# Altium PCB RaumluftsensorC3.PcbDoc
Units mm, origin at the board's own origin, x right, y up, seen from the top; angles counter-clockwise.
Board outline 38.1 x 38.1 mm, 2 copper layers (Top Layer, Bottom Layer); 6 components, 5 nets, 35 pads, 0 vias.
Unrouted connection lines stored in the file: 1.
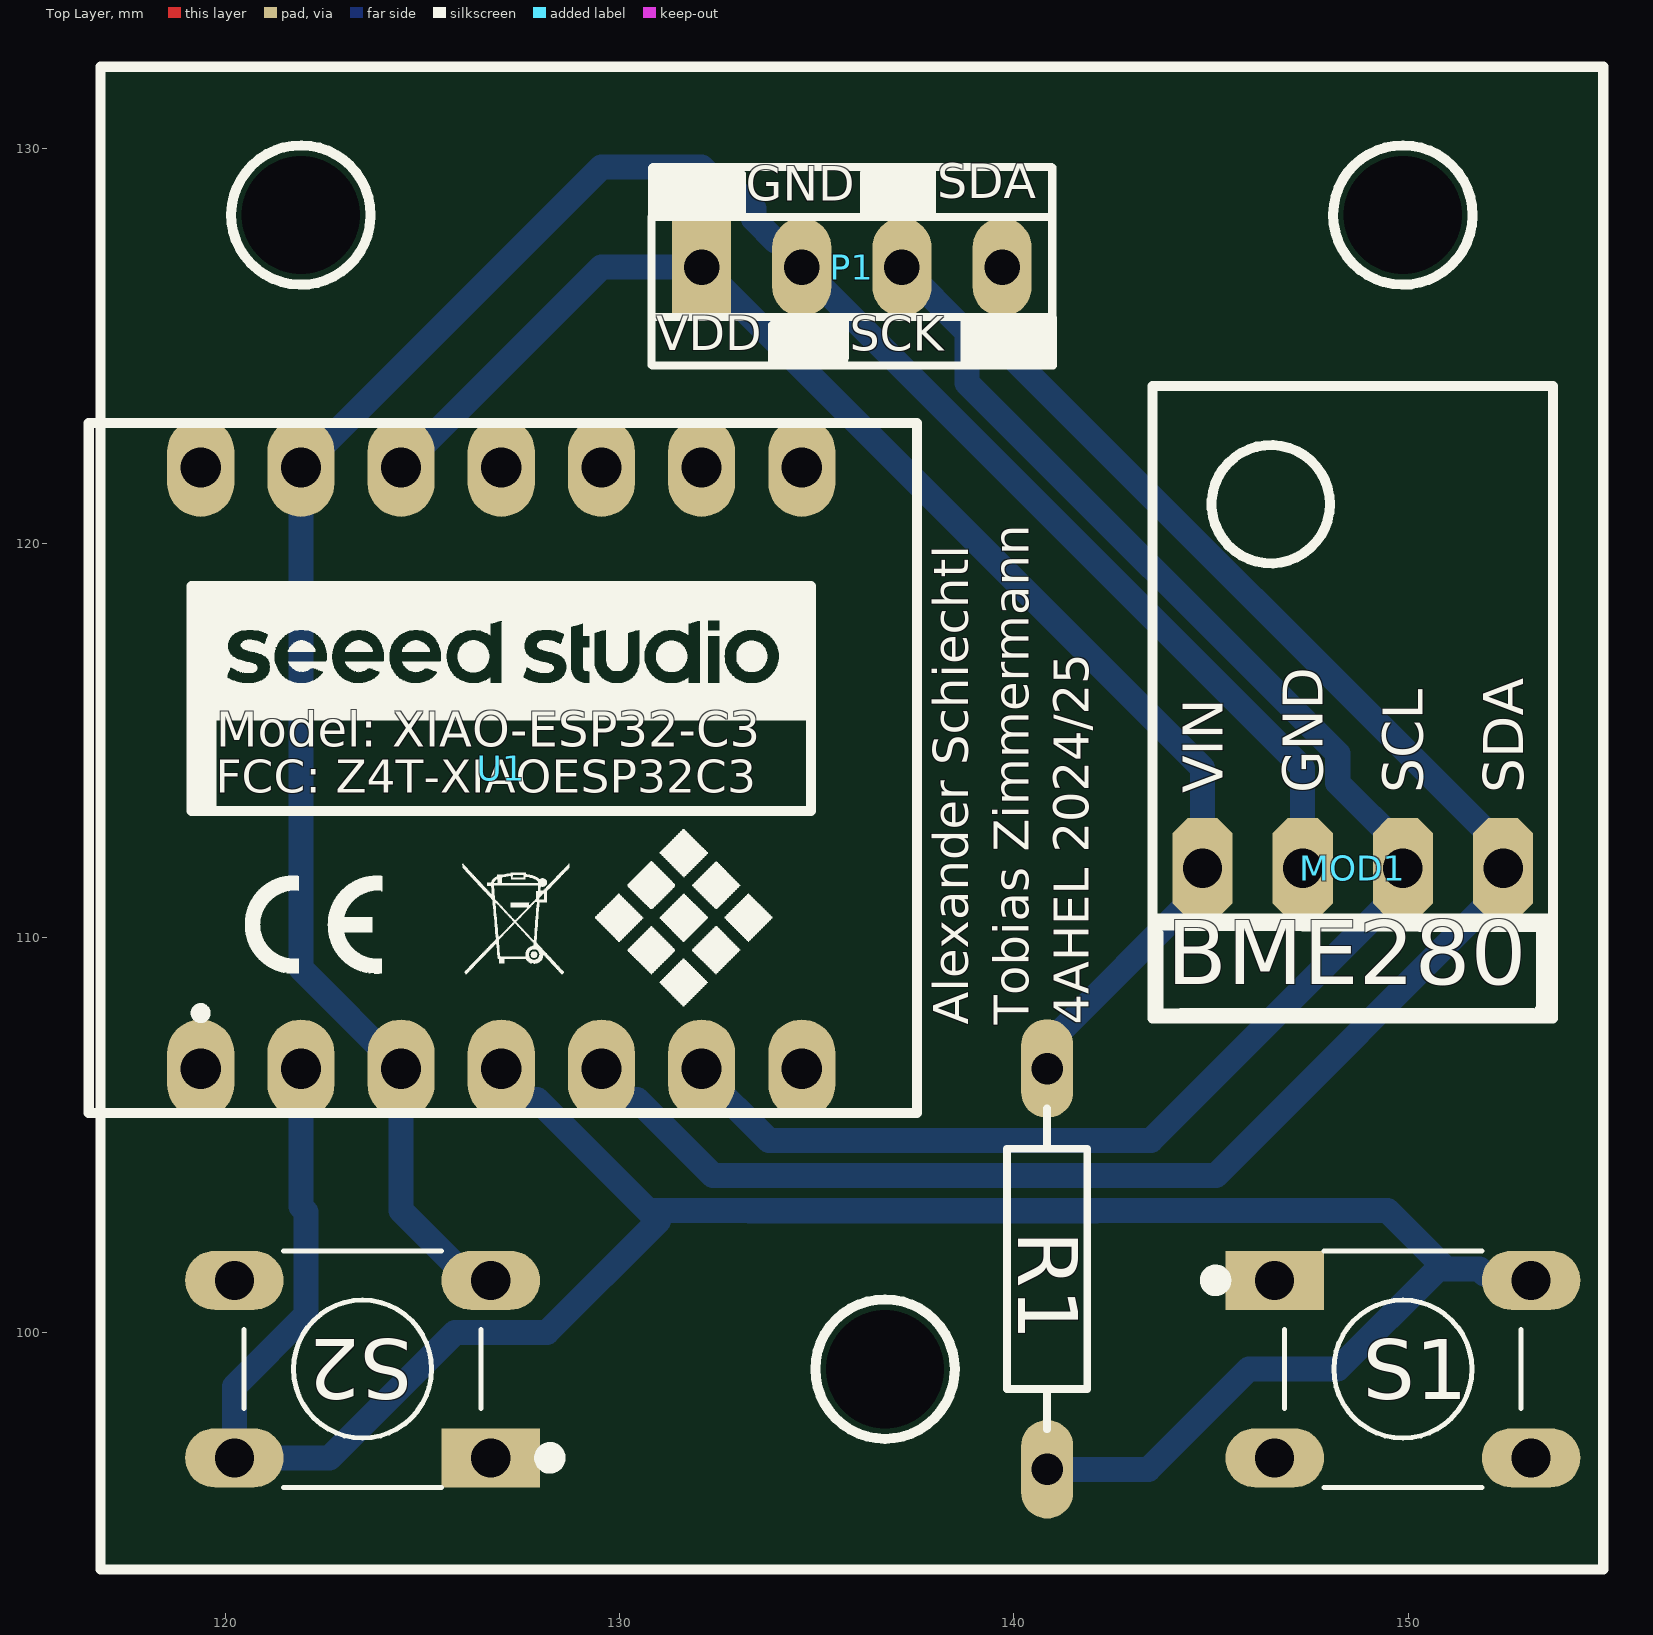
[diagram p0: Top Layer view]
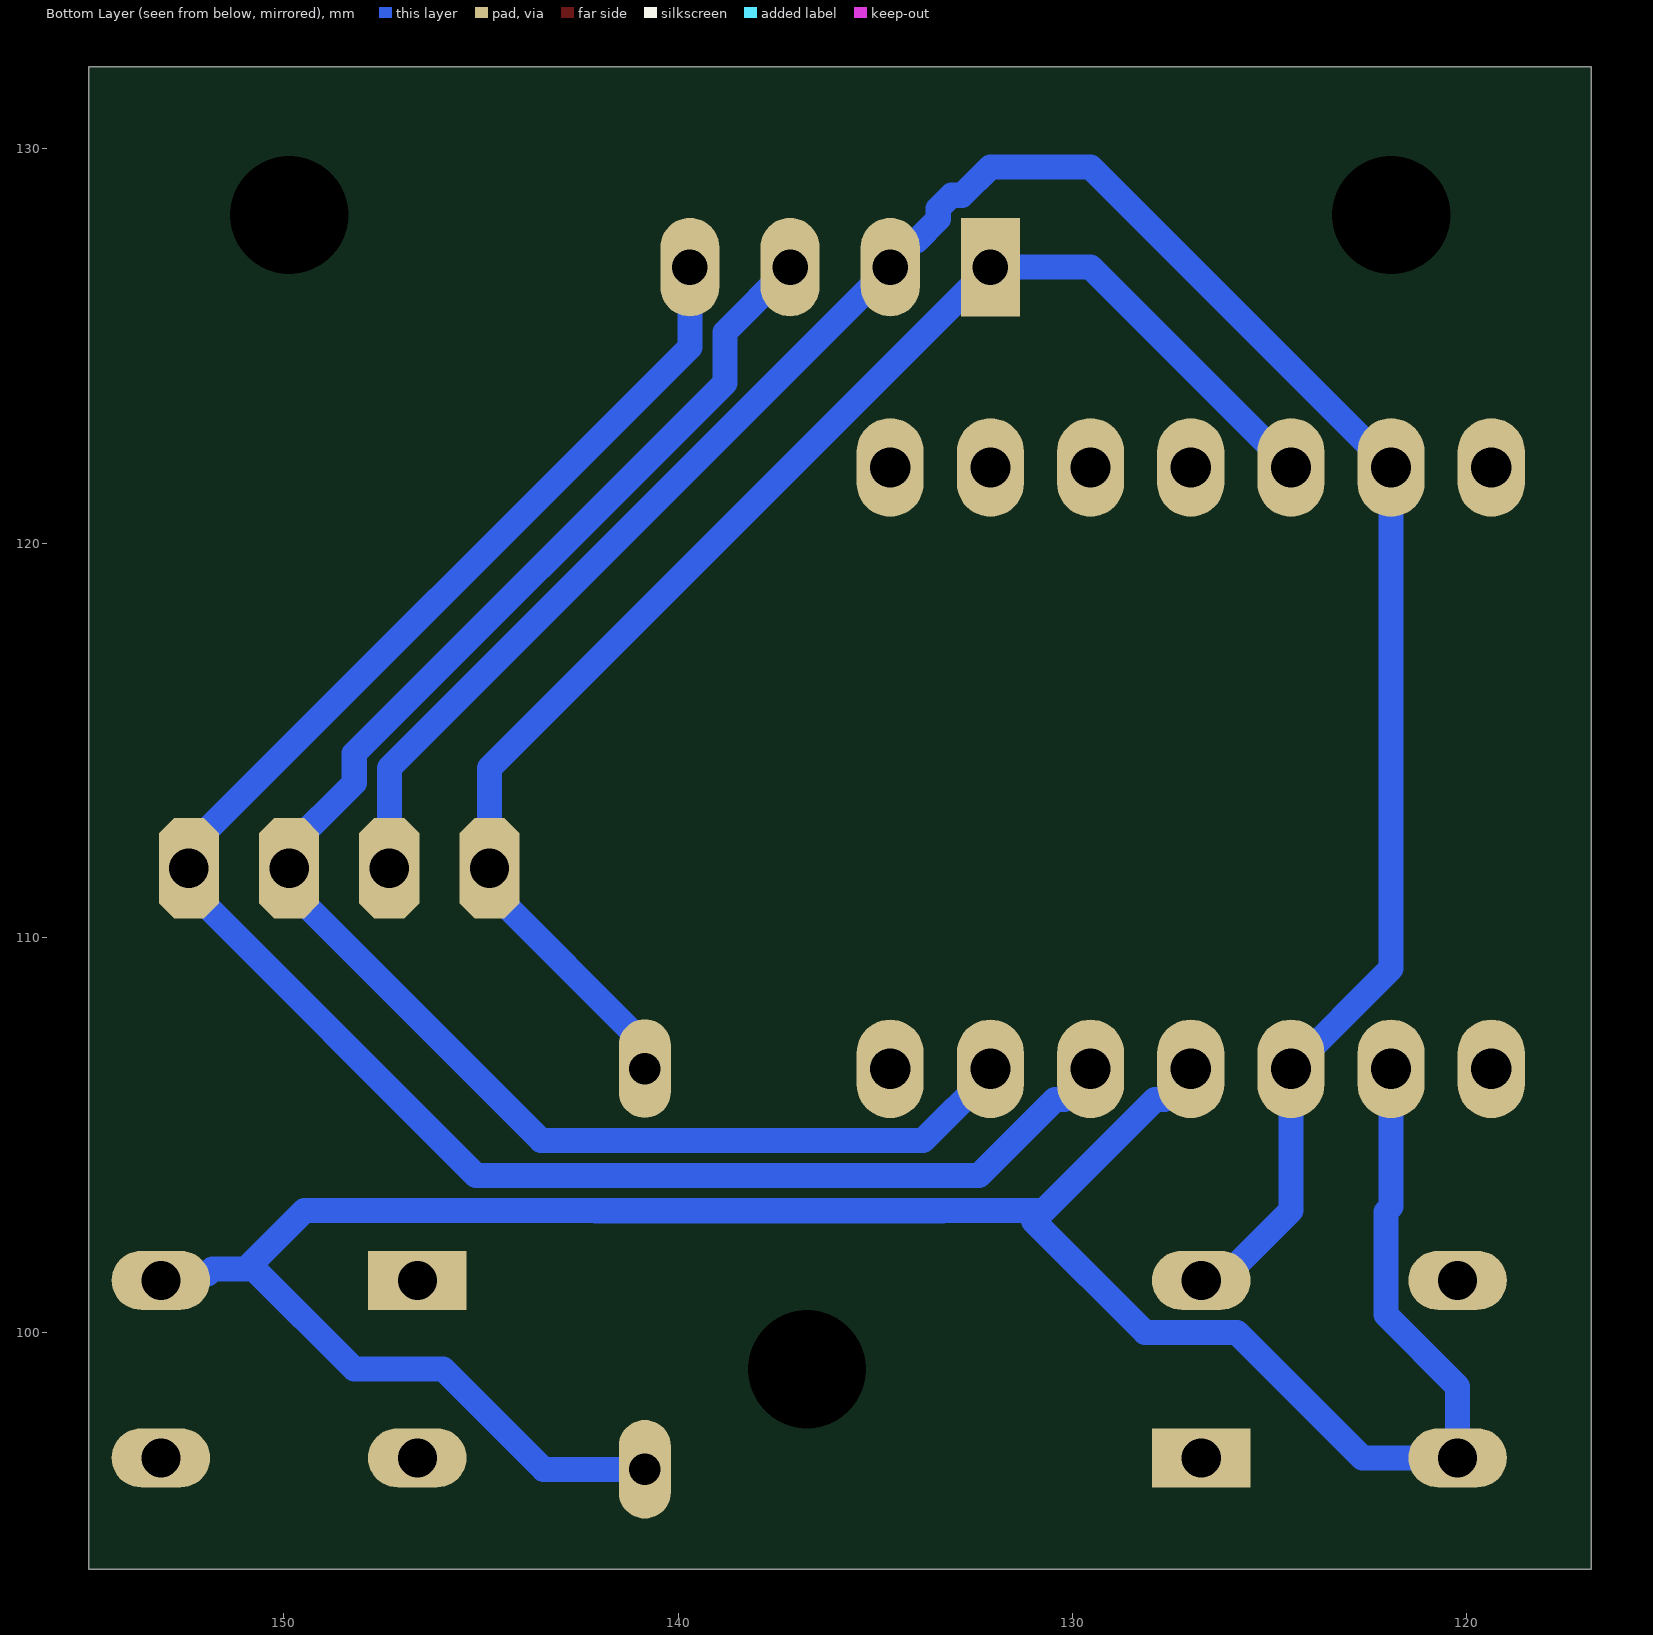
[diagram p1: Bottom Layer view, seen from below]
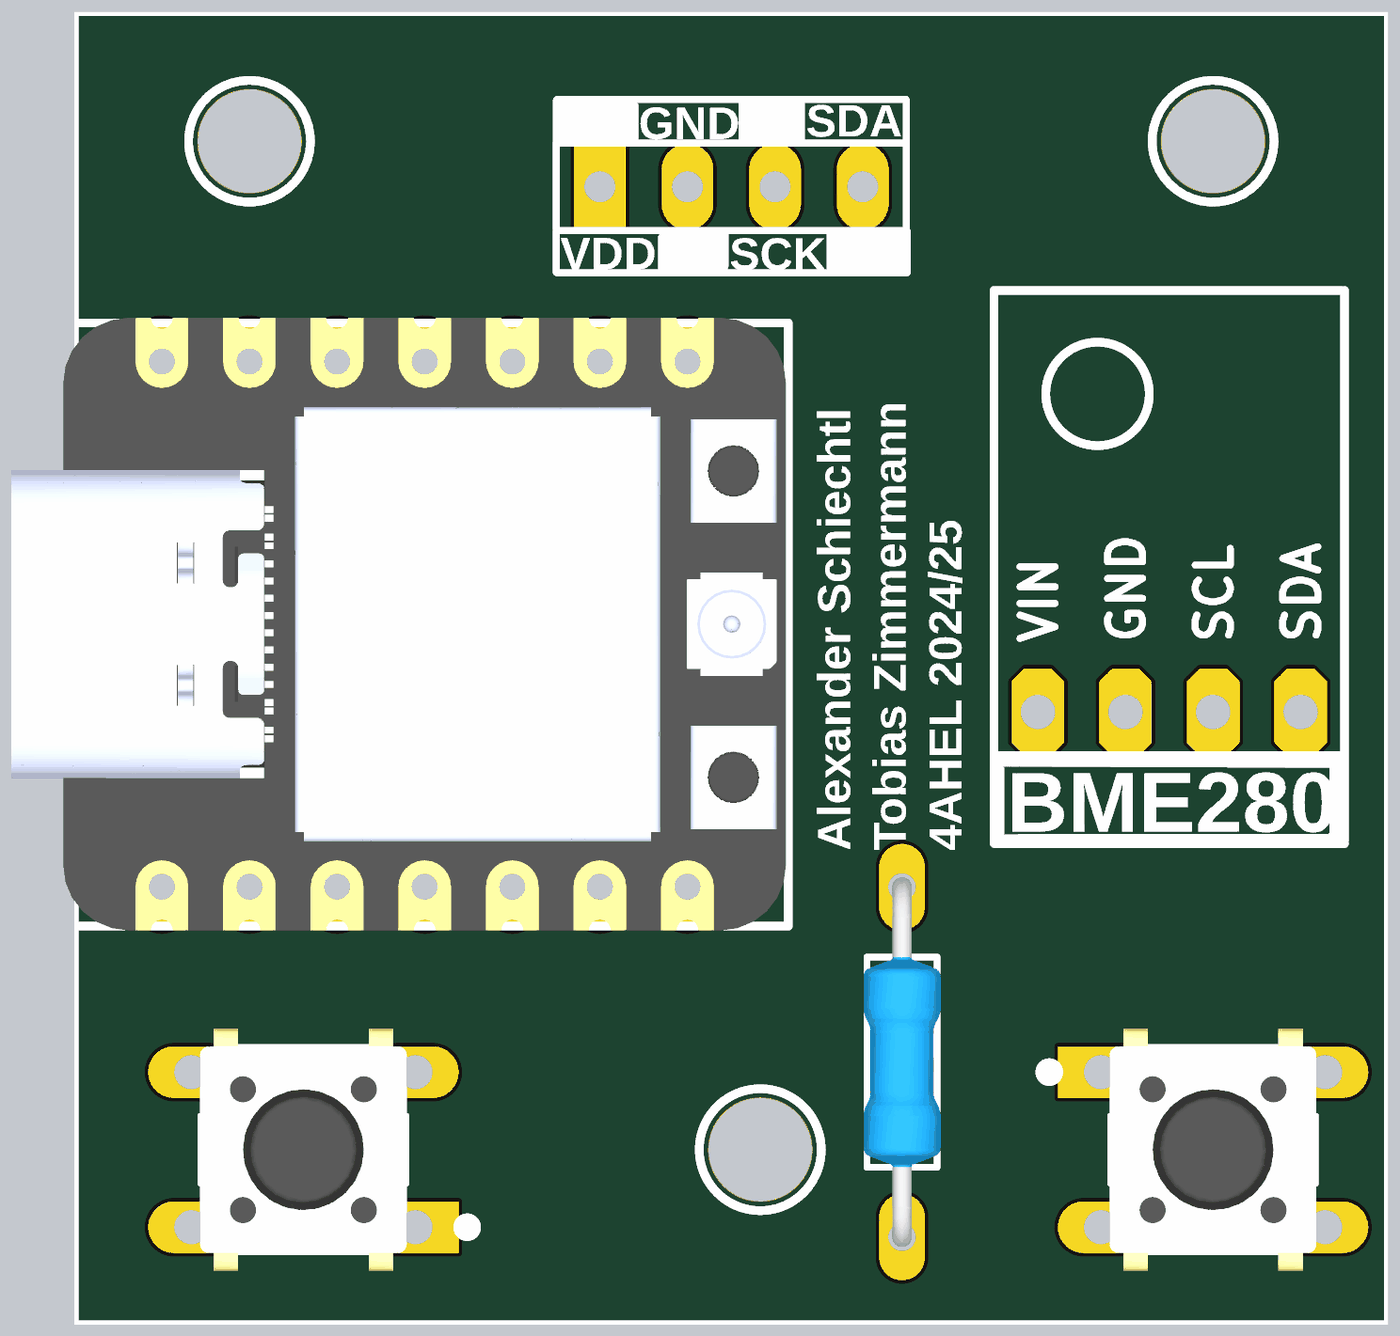
[diagram p2: 3D render of the assembled board from above, using the file's embedded part models]

## Layer stack, top to bottom
Top Solder: solder mask 0.0102, Solder Resist, Dk 3.5
Top Layer: signal copper 0.0356
Dielectric1: dielectric 0.32, FR-4, Dk 4.8
Bottom Layer: signal copper 0.0356
Bottom Solder: solder mask 0.0102, Solder Resist, Dk 3.5

## Board outline
116.84,93.98 116.84,132.08 154.94,132.08 154.94,93.98

## Design rules (kind name [scope] priority, off if disabled: settings)
Clearance "Text (Polygon)" [inPolygon vs isText] p1: gap=0 ignorepadtopadclearanceinfootprint=FALSE
Clearance "Masseflaeche (Polygon)" [All vs inPolygon] p2: gap=0.508 ignorepadtopadclearanceinfootprint=FALSE except(0: Arc-Hole Track-Hole SMDPad-Hole THPad-Hole Via-Hole Fill-Hole Poly-Hole Region-Hole Text-Hole)
Clearance "Abstand (Clearance)" [All] p3: gap=0.254 ignorepadtopadclearanceinfootprint=FALSE except(0: Arc-Hole Track-Hole SMDPad-Hole THPad-Hole Via-Hole Fill-Hole Poly-Hole Region-Hole Text-Hole)
DiffPairsRouting [All] p1: maxlimit=0.381 minlimit=0.305 mostfreqgap=0.305 toplayer_minwidth=0.381 toplayer_maxwidth=0.381 toplayer_prefwidth=0.381 bottomlayer_minwidth=0.381 bottomlayer_maxwidth=0.381 bottomlayer_prefwidth=0.381 maxuncoupledlength=12.7
FabricationTestPointUsage TestPointUsage [All] p1: valid=0 allowmultiple=FALSE
FabricationTestpoint Testpoint [All] p1: side=3 testpointundercomponent=TRUE minsize=1.016 maxsize=2.54 preferedsize=1.524 minholesize=0 maxholesize=1.016 preferedholesize=0.813 testpointgrid=0.025 allowsidetop=TRUE allowsidebottom=TRUE usegrid=TRUE gridtolerance=0
HoleSize [All] p1: absolutevalues=TRUE maxlimit=2.54 minlimit=0.711 maxpercent=80.000 minpercent=20.000
HoleToHoleClearance [All] p1: gap=0.254 allowstackedmicrovias=FALSE
PlaneConnect [All] p1: planeconnectstyle=Relief reliefexpansion=0.508 reliefentries=4 reliefconductorwidth=0.813 reliefairgap=0.254
PolygonConnect [All] p1: connectstyle=Relief reliefconductorwidth=0.813 reliefentries=4 polygonreliefangle="90 Angle" airgapwidth=0.254
RoomDefinition RaumluftsensorC3 [InComponentClass('RaumluftsensorC3')] p1: confinementstyle=ConfineIn formatcopy=TRUE lockcomponents=FALSE outline 101.6,67.11 176.087,67.11 176.087,128.578 101.6,128.578
RoutingVias [All] p1: holewidth=0.711 width=1.27 viastyle="Through Hole" minholewidth=0.711 minwidth=1.27 maxholewidth=0.711 maxwidth=1.27
SMDEntry [All] p1: side=TRUE corner=TRUE anyangle=FALSE
SilkToSilkClearance [All] p1 off: silktosilkclearance=0.254
SilkToSolderMaskClearance SilkscreenOverComponentPads [IsPad] p1 off: minsilkscreentomaskgap=0.254 clearancetoexposedcopper=TRUE
SolderMaskExpansion [All] p1: expansion=0.102 istentingtop=FALSE
UnRoutedNet [All] p1: checkbadconnections=TRUE
Width [All] p1: maxlimit=5.08 minlimit=0.635 preferedwidth=0.635 minimp=50.000000 maximp=50.000000 favimp=50.000000
21 further rules are at their usual default settings.

## Components (designator, comment, footprint, x,y, rotation, side; value= is the part's Value field where it differs from the comment)
MOD1 "BME280" BME280 144.78,111.76 r0 top
P1 "SSD1306" HDR1X4 132.08,127 r0 top
R1 "10K" R_0207/RM4 140.841,101.6 r270 top
S1 "FSM8JH" SW_FSM8JH 149.86,99.06 r0 top
S2 "FSM8JH" SW_FSM8JH 123.483,99.06 r180 top
U1 "XIAO-ESP32C3" PCBComponent_1 137.668,108.087 r90 top

## Footprints (in the part's own frame and the unit in brackets; to place one, negate y for a bottom-side part, rotate by r counter-clockwise, add the part's x,y. Pads: shape width x height; smd on the part's side, far side on the other; paste and mask are expansions set on the pad)
BME280 [mm] "GY-BME280-3.3 Module"
  oct 1.524x2.54 hole 1: 1(0,0) 2(2.54,0) 3(5.08,0) 4(7.62,0)
  silkscreen extent -1.27,-1.27 8.89,12.23
HDR1X4 [mm] "Connector; Header; 4 Position"
  rect 1.5x2.5 hole 0.9: 1(0,0)
  oval 1.5x2.5 hole 0.9: 2(2.54,0) 3(5.08,0) 4(7.62,0)
  silkscreen extent -1.27,-1.27 8.89,1.27
PCBComponent_1 [mm]
  oval 2.5x1.7 hole 1.02: 1(-1.413,18.288) 2(-1.413,15.748) 3(-1.413,13.208) 4(-1.413,10.668) 5(-1.413,8.128) 6(-1.413,5.588) 7(-1.413,3.048) 8(13.833,18.288) 9(13.833,15.748) 10(13.833,13.208) 11(13.833,10.668) 12(13.833,8.128) 13(13.833,5.588) 14(13.833,3.048)
  silkscreen extent -2.54,0.13 14.96,21.13, body extent -2.67,0.19 15.11,22.65, height 9.21
R_0207/RM4 [mm] "type 0207, RM4"
  oval 2.5x1.321 hole 0.8: 1(-5.08,0) 2(5.08,0)
  silkscreen extent -4.06,-1.02 4.06,1.02, body extent -5.36,-1.12 5.36,1.12, height 2.39
SW_FSM8JH [mm]
  rect 2.5x1.498 / inner oval 2.5x1.498 / far side rect 2.5x1.498 hole 0.99: 1(-3.25,2.25)
  oval 2.5x1.498 hole 0.99: 2(-3.25,-2.25) 3(3.25,2.25) 4(3.25,-2.25)
  silkscreen extent -4.95,-3 3,3, body extent -3,-3.95 3,3.95, height 9.5

## Part data
MOD1: "Bosch BME280 Module GY-BME280-3.3", LatestRevisionDate=06-Jan-2018, Published=06-Jan-2018, Publisher="Michael Kupfner", Usage="only permitted for non-commercial purposes at HTL I Innsbruck"
P1: library part "Header 4", "OLED SSD1306 - Display", LatestRevisionDate=17-Jul-2002, LatestRevisionNote="Re-released for DXP Platform.", Publisher="Altium Limited"
R1: library part R, "Resistor", LatestRevisionDate=07-Sep-2019, Published=21-Feb-2011, Usage="only permitted for non-commercial purposes at HTL I Innsbruck"
S1 S2: "Tactile Switch SPST-NO Top Actuated Through Hole", Package=None, Availability="In Stock", Check_prices=https://www.snapeda.com/parts/FSM8JH/TE+Connectivity+ALCOSWITCH+Switches/view-part/?ref=eda, MF="TE Connectivity", MP=FSM8JH, Price=None, SnapEDA_Link=https://www.snapeda.com/parts/FSM8JH/TE+Connectivity+ALCOSWITCH+Switches/view-part/?ref=snap

## Free pads (board coordinates)
  round 1.524 hole 3: 2(121.92,128.322) 2(136.73,99.06) 2(149.86,128.322)

## Nets (pads, with @x,y where several pads share a name; then routed paths per layer and width w, separated by ;. In a path a pad name is that pad's centre, name@x,y a point inside that pad or via, vN(x,y) a via of type N, cw(c..) or ccw(c..) an arc to the next point about the centre after c; other vN are vias at no path point)
GND: MOD1.2 P1.2 S1.2 S2.2 U1.3 U1.9 | length 60.6
  Bottom Layer w0.635: S2.2 126.232,101.31 124.46,103.082 U1.3 121.92,109.214 U1.9 129.54,129.54 132.08,129.54 132.798,128.822 133.067,128.822 133.402,128.487 133.402,128.218 133.954,127.666 134.22,127.666 134.62,127.266 P1.2 147.32,114.3 MOD1.2
NetMOD1_1: MOD1.1 P1.1 R1.1 U1.10 | length 36.9
  Bottom Layer w0.635: U1.10 129.54,127 P1.1 144.78,114.3 MOD1.1 144.78,111.23 140.841,107.291 R1.1
NetMOD1_3: MOD1.3 P1.3 U1.6 | length 42.3
  Bottom Layer w0.635: U1.6 132.08,106.562 133.79,104.853 141.346,104.853 141.353,104.86 143.468,104.86 149.86,111.252 MOD1.3 149.86,112.268 148.209,113.919 148.209,114.668 138.811,124.066 138.811,125.349 P1.3
NetMOD1_4: MOD1.4 P1.4 U1.5 | length 48.1
  Bottom Layer w0.635: U1.5 129.54,106.562 130.203,105.899 130.444,105.899 132.373,103.971 133.655,103.971 133.663,103.964 141.714,103.964 141.721,103.971 145.119,103.971 152.4,111.252 MOD1.4 152.4,112.268 139.7,124.968 P1.4
NetR1_2: R1.2 S1.3 S2.3 U1.2 U1.4 | length 64.9
  Bottom Layer w0.635: U1.2 121.92,103.18 122.055,103.046 122.055,100.444 120.233,98.622 S2.3 122.648,96.81 125.827,99.99 128.155,99.99 130.984,102.819 130.722,103.082 ; U1.4 127,106.562 127.663,105.899 127.904,105.899 130.722,103.082 ; R1.2 143.414,96.52 145.954,99.06 148.209,99.06 150.749,101.6 150.951,101.6 ; S1.3 152.945,101.475 151.93,101.475 151.806,101.6 150.951,101.6 ; 130.722,103.082 133.287,103.082 133.295,103.075 142.082,103.075 142.09,103.082 149.469,103.082 150.951,101.6
pads on no net: S1.1 S1.4 S2.1 S2.4 U1.1 U1.7 U1.8 U1.11 U1.12 U1.13 U1.14

## Polygon pours and split planes (outlines as drawn)
no net on Top Overlay "NONET_L-01_P-001" (solid): 119.771,113.27 119.206,113.27 119.15,113.214 119.15,116.948 119.74,116.948 119.771,116.917
no net on Top Overlay "NONET_L-01_P-001" (solid): 138.654,125.714 138.654,124.512 138.663,124.503 138.681,124.521 140.949,124.521 140.949,125.686 140.967,125.704
no net on Top Overlay "NONET_L-01_P-001" (solid): 133.753,125.695 133.765,125.683 133.765,124.578 135.773,124.578 135.791,124.559 135.809,124.578 135.809,125.677
no net on Top Overlay "NONET_L-01_P-001" (solid): 130.822,129.517 130.822,128.351 130.885,128.288 133.198,128.288 133.198,129.507 133.216,129.526
no net on Top Overlay "NONET_L-01_P-001" (solid): 136.089,129.544 136.098,129.535 136.098,128.306 138.004,128.306 138.022,128.288 138.022,129.526
no net on Top Overlay "NONET_L-01_P-001" (solid): 143.51,110.49 143.51,107.95 153.664,107.95 153.67,107.944 153.67,110.49

## Other copper
Top Layer:
  text "LAYOUT TOP" at 261.62,22.352 h1.78
  text "2" at 261.62,7.112 h1.78
Bottom Layer:
  text "LAYOUT BOTTOM" at 261.62,22.352 h1.78
  text "3" at 261.62,7.112 h1.78

## Silkscreen, mask and mechanical layers (free items; w line width, h text height)
Top Overlay:
  drawing of 47 lines, arcs and shapes, not listed
  text "SDA" at 138.057,128.458 h1.5
  text "GND" at 133.202,128.388 h1.5
  text "VDD" at 130.929,124.607 h1.5
  text "SCK" at 135.836,124.592 h1.5
  text "Model: XIAO-ESP32-C3" at 119.768,114.547 h1.52
  text "FCC: Z4T-XIAOESP32C3" at 119.766,113.396 h1.45
  text "BME280" at 143.872,108.29 h2.79
  text "Alexander Schiechtl / Tobias Zimmermann / 4AHEL 2024/25" at 142.183,107.791 h1.52 r90
  text "BESTUECK. TOP" at 261.62,22.352 h1.78
  text "4" at 261.62,7.112 h1.78
Bottom Overlay:
  text "BESTUECK. BOTTOM" at 261.62,22.352 h1.78
  text "5" at 261.62,7.112 h1.78
Mechanical 4 (Printumriss):
  the board outline again, w0.254
Mechanical 16 (Blatt-Beschriftung):
  drawing of 350 lines, arcs and shapes, not listed
  text "1" at 36.246,189.611 h1.78
  text "2" at 108.89,189.611 h1.78
  text "3" at 182.042,189.611 h1.78
  text "4" at 254.94,189.611 h1.78
  text "A" at 1.905,166.599 h1.78
  text "A" at 288.925,166.599 h1.78
  text "B" at 1.905,118.542 h1.78
  text "B" at 288.925,118.542 h1.78
  text "C" at 1.905,70.028 h1.78
  text "C" at 288.925,70.028 h1.78
  text "TITEL:" at 173.99,33.02 h1.14
  text "PROJEKTNAME" at 175.26,29.972 h1.78
  text "NAME:" at 173.99,25.4 h1.14
  text "GRUPPE:" at 212.09,25.4 h1.14
  text "KLASSE:" at 233.172,25.4 h1.14
  text "DOKUMENTENART:" at 260.35,25.4 h1.14
  text "MAX MUSTERMANN" at 175.26,22.352 h1.78
  text "I" at 213.36,22.352 h1.78
  text "KLASSE" at 234.442,22.352 h1.78
  text "D" at 1.905,22.022 h1.78
  text "D" at 288.925,22.022 h1.78
  text "DATUM:" at 173.99,17.78 h1.14
  text "REVISION:" at 212.09,17.78 h1.14
  text "MASZSTAB:" at 233.172,17.78 h1.14
  text "DOKUMENTENSTATUS:" at 260.35,17.78 h1.14
  text "HTBLVA" at 140.97,15.24 h1.78
  text ".PRINT_DATE" at 175.26,14.732 h1.78
  text "0.1" at 213.36,14.732 h1.78
  text ".Print_Scale" at 234.442,14.732 h1.78
  text "ENTWURF" at 261.62,14.732 h1.78
  text "Abt. Elektronik" at 140.97,12.7 h1.78
  text "Anichstrasse 26-28" at 140.97,10.16 h1.78
  text "SACHNUMMER/DATEINAME:" at 173.99,10.16 h1.14
  text "BLATT:" at 260.35,10.16 h1.14
  text "BLAETTER:" at 274.32,10.16 h1.14
  text "A-6020 Innsbruck" at 140.97,7.62 h1.78
  text ".PCB_FILE_NAME_NO_PATH" at 175.26,7.112 h1.78
  text "6" at 275.59,7.112 h1.78
  text "1" at 36.246,1.651 h1.78
  text "2" at 108.89,1.651 h1.78
  text "3" at 182.042,1.651 h1.78
  text "4" at 254.94,1.651 h1.78
Drill Drawing:
  text ".LEGEND" at 119.38,45.72 h1.52
  text "BOHRPLAN" at 261.62,22.352 h1.78
  text "6" at 261.62,7.112 h1.78

## Dimensions
154.94,93.98 to 154.94,132.08 on Mechanical 3 (Bemassungen)
116.84,93.98 to 154.94,93.98 on Mechanical 3 (Bemassungen)

## Text inside footprints (layer, text, board x,y; h text height)
MOD1: Top Overlay "VIN" at 145.288,113.665 h1.02 r90; Top Overlay "GND" at 147.828,113.665 h1.02 r90; Top Overlay "SCL" at 150.368,113.665 h1.02 r90; Top Overlay "SDA" at 152.908,113.665 h1.02 r90